# EAGLE board Jubeat Controller (EAGLE 6.2)
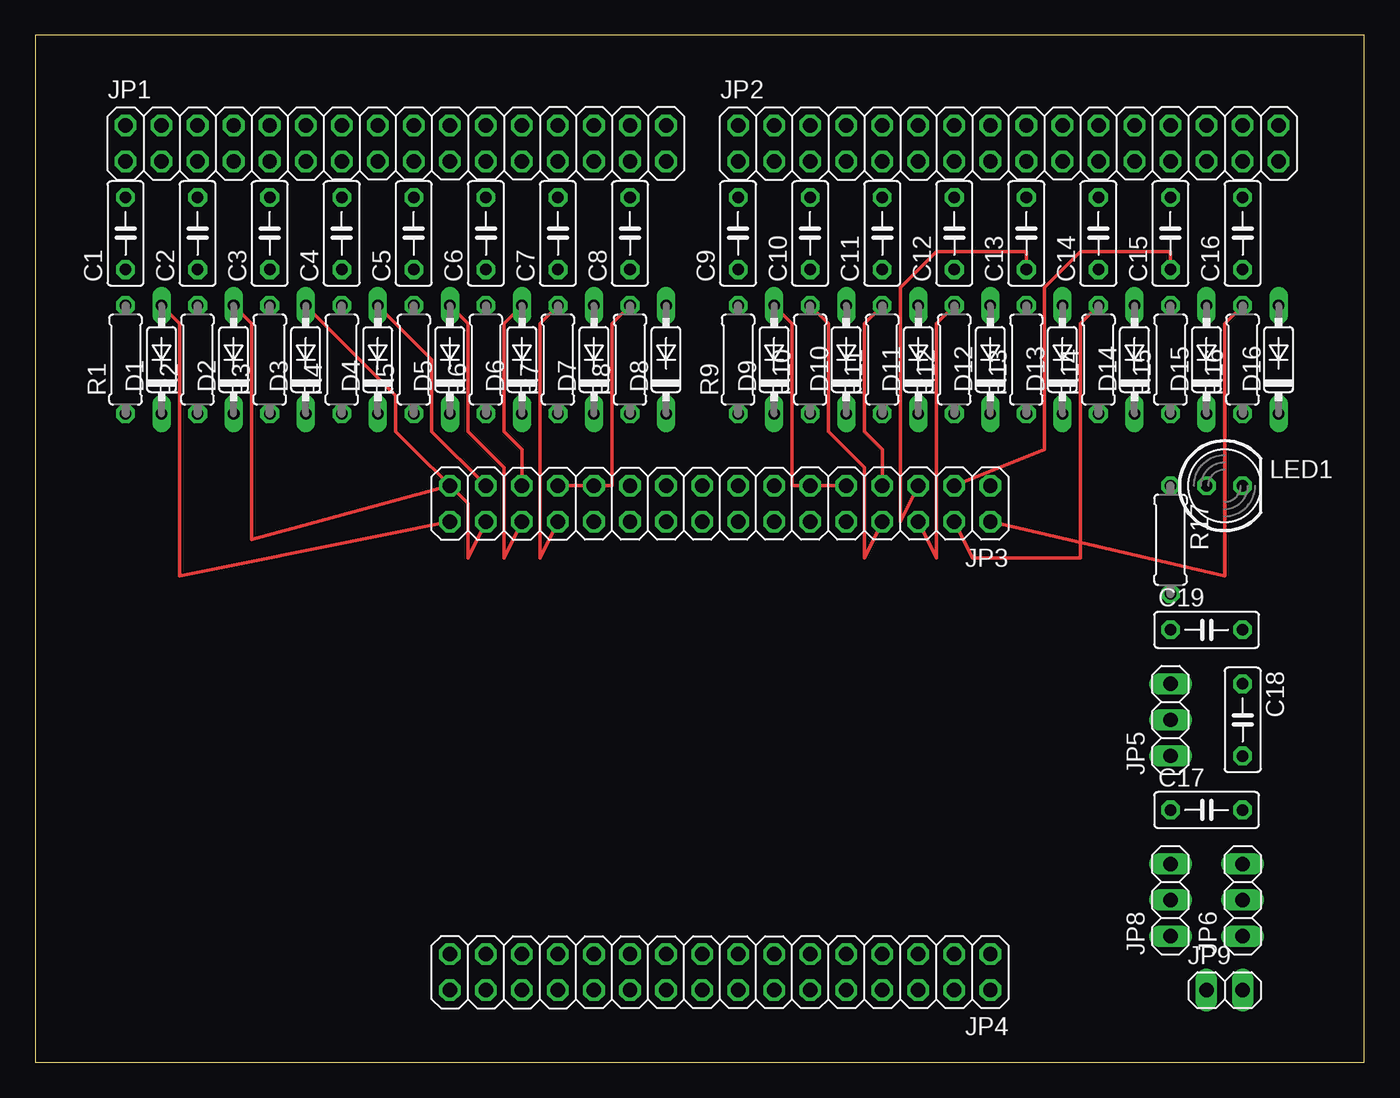
[diagram p0: board, top side]
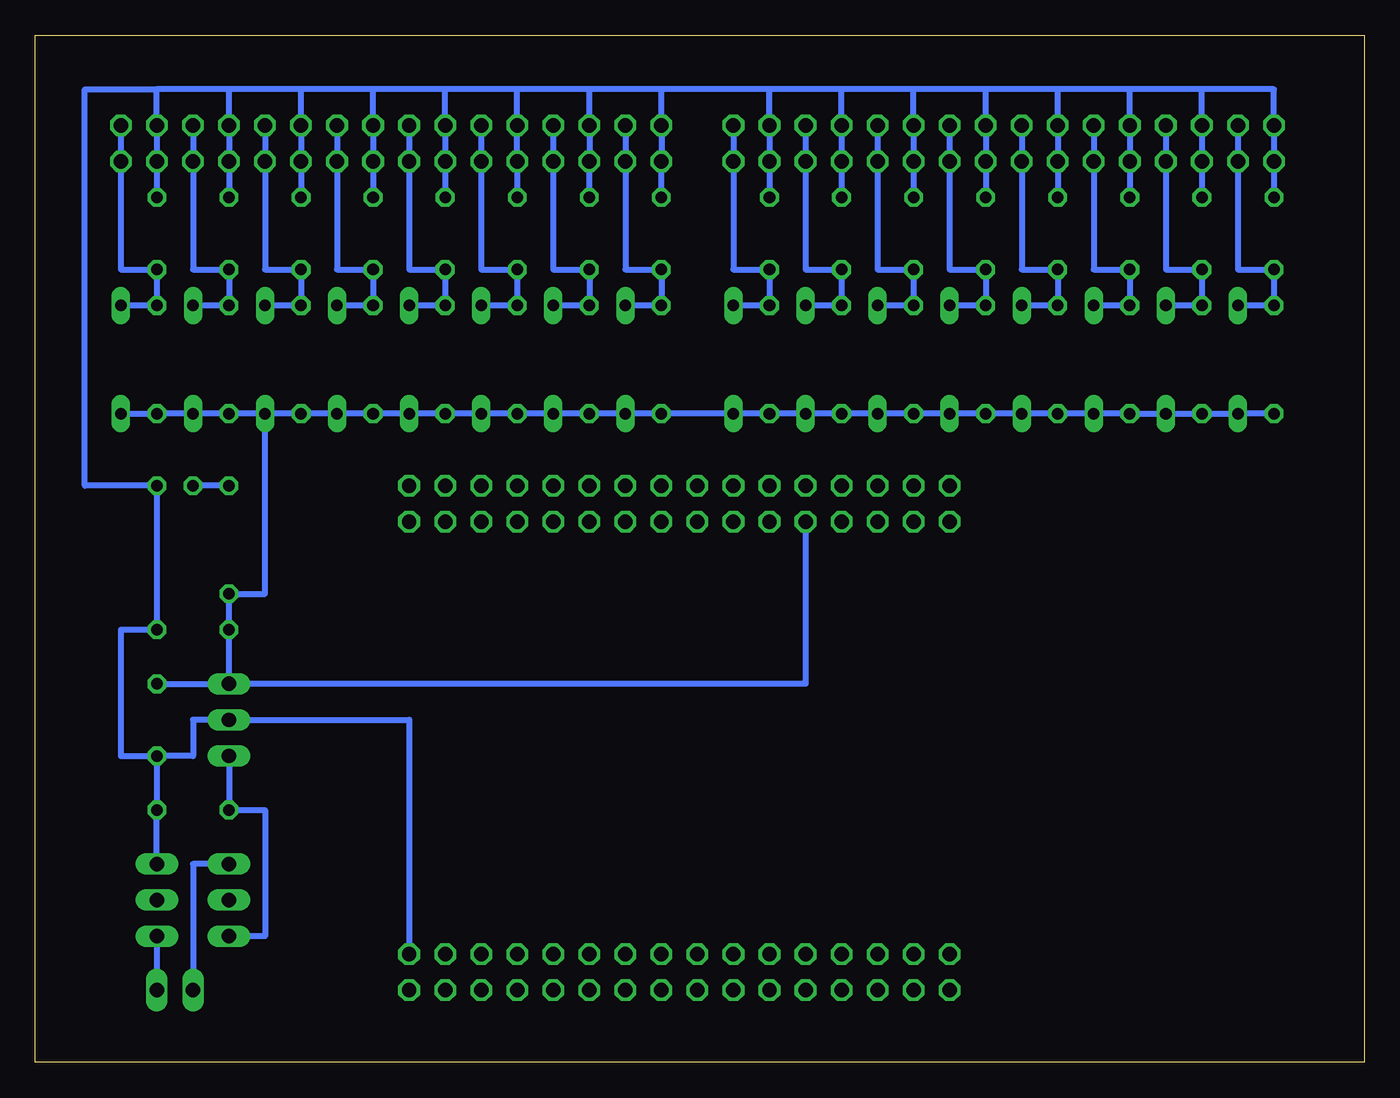
[diagram p1: board, bottom side, seen from below]

Size 93.65 x 72.38 mm. Coordinates in mm from the lower left corner, seen from the top.
Outline: 0,0 93.65,0 93.65,72.38 0,72.38 0,0
Copper layers (1*16): Top 0.035mm / dielectric 1.5mm / Bottom 0.035mm
Design rules: minimum track width 10mil, minimum drill 24mil, track to track 8mil, track to pad 8mil, pad to pad 8mil, via to via 8mil, smd to smd 8mil, copper to edge 40mil, drill to drill 8mil, minimum pad ring 10mil, minimum via ring 8mil, stop-mask expansion 4mil, vias tented up to drill 0mil, thermal gap 10mil

## Footprints (pad centres in the part's own frame; a part is rotated, then mirrored left to right if it is on the bottom)
C050-025X075 = drill 0.813 octagon: 1 -2.54,0; 2 2.54,0
DO35-7 = drill 0.813 long: A 3.81,0; C -3.81,0
2X16 = drill 1.016 octagon: 1 -19.05,-1.27; 2 -19.05,1.27; 3 -16.51,-1.27; 4 -16.51,1.27; 5 -13.97,-1.27; 6 -13.97,1.27; 7 -11.43,-1.27; 8 -11.43,1.27; 9 -8.89,-1.27; 10 -8.89,1.27; 11 -6.35,-1.27; 12 -6.35,1.27; 13 -3.81,-1.27; 14 -3.81,1.27; 15 -1.27,-1.27; 16 -1.27,1.27; 17 1.27,-1.27; 18 1.27,1.27; 19 3.81,-1.27; 20 3.81,1.27; 21 6.35,-1.27; 22 6.35,1.27; 23 8.89,-1.27; 24 8.89,1.27; 25 11.43,-1.27; 26 11.43,1.27; 27 13.97,-1.27; 28 13.97,1.27; 29 16.51,-1.27; 30 16.51,1.27; 31 19.05,-1.27; 32 19.05,1.27
1X03 = drill 1.016 long: 1 -2.54,0; 2 0,0; 3 2.54,0
1X02 = drill 1.016 long: 1 -1.27,0; 2 1.27,0
LED5MM = drill 0.813 octagon: A -1.27,0; K 1.27,0
0207/7 = drill 0.813 octagon: 1 -3.81,0; 2 3.81,0

## Placement (x,y rotation side)
C1  [C050-025X075]  6.35,58.42 90 top
C2  [C050-025X075]  11.43,58.42 90 top
C3  [C050-025X075]  16.51,58.42 90 top
C4  [C050-025X075]  21.59,58.42 90 top
C5  [C050-025X075]  26.67,58.42 90 top
C6  [C050-025X075]  31.75,58.42 90 top
C7  [C050-025X075]  36.83,58.42 90 top
C8  [C050-025X075]  41.91,58.42 90 top
C9  [C050-025X075]  49.53,58.42 90 top
C10  [C050-025X075]  54.61,58.42 90 top
C11  [C050-025X075]  59.69,58.42 90 top
C12  [C050-025X075]  64.77,58.42 90 top
C13  [C050-025X075]  69.85,58.42 90 top
C14  [C050-025X075]  74.93,58.42 90 top
C15  [C050-025X075]  80.01,58.42 90 top
C16  [C050-025X075]  85.09,58.42 90 top
C17  [C050-025X075]  82.55,17.78 0 top
C18  [C050-025X075]  85.09,24.13 270 top
C19  [C050-025X075]  82.55,30.48 0 top
D1  1N4148DO35-7  [DO35-7]  8.89,49.53 90 top
D2  1N4148DO35-7  [DO35-7]  13.97,49.53 90 top
D3  1N4148DO35-7  [DO35-7]  19.05,49.53 90 top
D4  1N4148DO35-7  [DO35-7]  24.13,49.53 90 top
D5  1N4148DO35-7  [DO35-7]  29.21,49.53 90 top
D6  1N4148DO35-7  [DO35-7]  34.29,49.53 90 top
D7  1N4148DO35-7  [DO35-7]  39.37,49.53 90 top
D8  1N4148DO35-7  [DO35-7]  44.45,49.53 90 top
D9  1N4148DO35-7  [DO35-7]  52.07,49.53 90 top
D10  1N4148DO35-7  [DO35-7]  57.15,49.53 90 top
D11  1N4148DO35-7  [DO35-7]  62.23,49.53 90 top
D12  1N4148DO35-7  [DO35-7]  67.31,49.53 90 top
D13  1N4148DO35-7  [DO35-7]  72.39,49.53 90 top
D14  1N4148DO35-7  [DO35-7]  77.47,49.53 90 top
D15  1N4148DO35-7  [DO35-7]  82.55,49.53 90 top
D16  1N4148DO35-7  [DO35-7]  87.63,49.53 90 top
JP1  [2X16]  25.4,64.77 0 top
JP2  [2X16]  68.58,64.77 0 top
JP3  LEFT  [2X16]  48.26,39.37 180 top
JP4  RIGHT  [2X16]  48.26,6.35 180 top
JP5  [1X03]  80.01,24.13 90 top
JP6  [1X03]  85.09,11.43 90 top
JP8  [1X03]  80.01,11.43 90 top
JP9  [1X02]  83.82,5.08 0 top
LED1  [LED5MM]  83.82,40.64 0 top
R1  [0207/7]  6.35,49.53 90 top
R2  [0207/7]  11.43,49.53 90 top
R3  [0207/7]  16.51,49.53 90 top
R4  [0207/7]  21.59,49.53 90 top
R5  [0207/7]  26.67,49.53 90 top
R6  [0207/7]  31.75,49.53 90 top
R7  [0207/7]  36.83,49.53 90 top
R8  [0207/7]  41.91,49.53 90 top
R9  [0207/7]  49.53,49.53 90 top
R10  [0207/7]  54.61,49.53 90 top
R11  [0207/7]  59.69,49.53 90 top
R12  [0207/7]  64.77,49.53 90 top
R13  [0207/7]  69.85,49.53 90 top
R14  [0207/7]  74.93,49.53 90 top
R15  [0207/7]  80.01,49.53 90 top
R16  [0207/7]  85.09,49.53 90 top
R17  [0207/7]  80.01,36.83 270 top

## Library data of the parts
C1-C16 R1-R16 = resistor
C17-C19 R17 = rcl
D1-D16 = diode
JP1-JP6 JP8 JP9 = pinhead
LED1 = led

## Nets
GND: C1.2 C2.2 C3.2 C4.2 C5.2 C6.2 C7.2 C8.2 C9.2 C10.2 C11.2 C12.2 C13.2 C14.2 C15.2 C16.2 C17.2 C18.2 C19.2 JP1.1 JP1.2 JP1.5 JP1.6 JP1.9 JP1.10 JP1.13 JP1.14 JP1.17 JP1.18 JP1.21 JP1.22 JP1.25 JP1.26 JP1.29 JP1.30 JP2.1 JP2.2 JP2.5 JP2.6 JP2.9 JP2.10 JP2.13 JP2.14 JP2.17 JP2.18 JP2.21 JP2.22 JP2.25 JP2.26 JP2.29 JP2.30 JP4.1 JP5.2 JP6.3 LED1.K
N$1: C17.1 JP5.1 JP8.1
N$2: C2.1 D2.A JP1.7 JP1.8 JP3.31 R2.2
N$5: JP6.1 JP9.2
N$6: C6.1 D6.A JP1.23 JP1.24 JP3.27 R6.2
N$7: LED1.A R17.1
N$8: C8.1 D8.A JP1.31 JP1.32 JP3.25 R8.2
N$9: C9.1 D9.A JP2.3 JP2.4 JP3.9 R9.2
N$10: C10.1 D10.A JP2.7 JP2.8 JP3.8 R10.2
N$11: C11.1 D11.A JP2.11 JP2.12 JP3.7 R11.2
N$12: C12.1 D12.A JP2.15 JP2.16 JP3.6 R12.2
N$13: C13.1 D13.A JP2.19 JP2.20 JP3.5 R13.2
N$14: C14.1 D14.A JP2.23 JP2.24 JP3.4 R14.2
N$15: C15.1 D15.A JP2.27 JP2.28 JP3.3 R15.2
N$16: C16.1 D16.A JP2.31 JP2.32 JP3.2 R16.2
N$18: C7.1 D7.A JP1.27 JP1.28 JP3.26 R7.2
N$19: JP8.3 JP9.1
N$21: C5.1 D5.A JP1.19 JP1.20 JP3.28 R5.2
N$23: C3.1 D3.A JP1.11 JP1.12 JP3.30 R3.2
N$24: C1.1 D1.A JP1.3 JP1.4 JP3.32 R1.2
N$26: C4.1 D4.A JP1.15 JP1.16 JP3.29 R4.2
VCC: C18.1 C19.1 D1.C D2.C D3.C D4.C D5.C D6.C D7.C D8.C D9.C D10.C D11.C D12.C D13.C D14.C D15.C D16.C JP3.24 JP5.3 R1.1 R2.1 R3.1 R4.1 R5.1 R6.1 R7.1 R8.1 R9.1 R10.1 R11.1 R12.1 R13.1 R14.1 R15.1 R16.1 R17.2

## Tracks (layer width: path | path; a pad name or v marks a point on that pad's centre or on a via)
GND
  Bottom 0.406: JP6.3 C17.2 C18.2 | JP4.1 67.31,24.13 JP5.2 82.55,24.13 82.55,21.59 C18.2 | C18.2 87.63,21.59 87.63,30.48 C19.2 LED1.K 90.17,40.64 90.17,68.58 85.09,68.58 | C9.2 JP2.1 JP2.2 49.53,68.58 | C10.2 JP2.5 JP2.6 54.61,68.58 | C11.2 JP2.9 JP2.10 59.69,68.58 | C1.2 JP1.1 JP1.2 6.35,68.58 11.43,68.58 | C2.2 JP1.5 JP1.6 11.43,68.58 | C3.2 JP1.9 JP1.10 16.51,68.58 | C4.2 JP1.13 JP1.14 21.59,68.58 | C5.2 JP1.17 JP1.18 26.67,68.58 | C6.2 JP1.21 JP1.22 31.75,68.58 | C7.2 JP1.25 JP1.26 36.83,68.58 | C8.2 JP1.29 JP1.30 41.91,68.58 | C12.2 JP2.13 JP2.14 64.77,68.58 | C13.2 JP2.17 JP2.18 69.85,68.58 | C14.2 JP2.21 JP2.22 74.93,68.58 | C15.2 JP2.25 JP2.26 80.01,68.58 | C16.2 JP2.29 JP2.30 85.09,68.58 | 11.43,68.58 16.51,68.58 | 16.51,68.58 21.59,68.58 | 21.59,68.58 26.67,68.58 | 26.67,68.58 31.75,68.58 | 31.75,68.58 36.83,68.58 | 36.83,68.58 41.91,68.58 | 41.91,68.58 49.53,68.58 | 49.53,68.58 54.61,68.58 | 54.61,68.58 59.69,68.58 | 59.69,68.58 64.77,68.58 | 64.77,68.58 69.85,68.58 | 69.85,68.58 74.93,68.58 | 74.93,68.58 80.01,68.58 | 80.01,68.58 85.09,68.58
N$1
  Bottom 0.406: JP5.1 C17.1 77.47,17.78 77.47,8.89 JP8.1
N$2
  Top 0.254: JP3.31 15.24,36.83 15.24,52.07 D2.A
  Bottom 0.406: JP1.8 JP1.7 13.97,55.88 C2.1 R2.2 D2.A
N$5
  Bottom 0.406: JP6.1 JP9.2
N$6
  Top 0.254: JP3.27 34.29,43.18 33.02,44.45 33.02,52.07 D6.A
  Bottom 0.406: JP1.24 JP1.23 34.29,55.88 C6.1 R6.2 D6.A
N$7
  Bottom 0.406: R17.1 LED1.A
N$8
  Top 0.254: JP3.25 40.64,40.64 40.64,52.07 R8.2
  Bottom 0.406: JP1.32 JP1.31 44.45,55.88 C8.1 R8.2 D8.A
N$9
  Top 0.254: JP3.9 53.34,40.64 53.34,52.07 D9.A
  Bottom 0.406: JP2.4 JP2.3 52.07,55.88 C9.1 R9.2 D9.A
N$10
  Top 0.254: JP3.8 58.42,35.56 58.42,41.91 55.88,44.45 55.88,52.07 R10.2
  Bottom 0.406: JP2.8 JP2.7 57.15,55.88 C10.1 R10.2 D10.A
N$11
  Top 0.254: JP3.7 59.69,43.18 58.42,44.45 58.42,52.07 R11.2
  Bottom 0.406: JP2.12 JP2.11 62.23,55.88 C11.1 R11.2 D11.A
N$12
  Top 0.254: JP3.6 63.5,35.56 63.5,52.07 R12.2
  Bottom 0.406: JP2.16 JP2.15 67.31,55.88 C12.1 R12.2 D12.A
N$13
  Top 0.254: JP3.5 60.96,38.1 60.96,54.61 63.5,57.15 69.85,57.15 C13.1
  Bottom 0.406: JP2.20 JP2.19 72.39,55.88 C13.1 R13.2 D13.A
N$14
  Top 0.254: JP3.4 66.04,35.56 73.66,35.56 73.66,52.07 R14.2
  Bottom 0.406: JP2.24 JP2.23 77.47,55.88 C14.1 R14.2 D14.A
N$15
  Top 0.254: JP3.3 71.12,43.18 71.12,54.61 73.66,57.15 80.01,57.15 C15.1
  Bottom 0.406: JP2.28 JP2.27 82.55,55.88 C15.1 R15.2 D15.A
N$16
  Top 0.254: JP3.2 83.82,34.29 83.82,52.07 R16.2
  Bottom 0.406: JP2.32 JP2.31 87.63,55.88 C16.1 R16.2 D16.A
N$18
  Top 0.254: JP3.26 35.56,35.56 35.56,52.07 R7.2
  Bottom 0.406: JP1.28 JP1.27 39.37,55.88 C7.1 R7.2 D7.A
N$19
  Bottom 0.406: JP8.3 82.55,13.97 JP9.1
N$21
  Top 0.254: JP3.28 33.02,35.56 33.02,41.91 30.48,44.45 30.48,52.07 D5.A
  Bottom 0.406: JP1.20 JP1.19 29.21,55.88 C5.1 R5.2 D5.A
N$23
  Top 0.254: JP3.30 30.48,35.56 30.48,39.37 25.4,44.45 25.4,46.99 D3.A
  Bottom 0.406: JP1.12 JP1.11 19.05,55.88 C3.1 R3.2 D3.A
N$24
  Top 0.254: JP3.32 10.16,34.29 10.16,52.07 D1.A
  Bottom 0.406: JP1.4 JP1.3 8.89,55.88 C1.1 R1.2 D1.A
N$26
  Top 0.254: JP3.29 27.94,44.45 27.94,49.53 D4.A
  Bottom 0.406: JP1.16 JP1.15 24.13,55.88 C4.1 R4.2 D4.A
VCC
  Bottom 0.406: C18.1 JP5.3 | JP5.3 C19.1 R17.2 77.47,33.02 D14.C | D16.C R16.1 D15.C R15.1 D14.C | D14.C R14.1 D13.C R13.1 D12.C R12.1 D11.C R11.1 D10.C R10.1 D9.C R9.1 D8.C R8.1 D7.C R7.1 D6.C R6.1 D5.C R5.1 D4.C R4.1 D3.C R3.1 D2.C R2.1 D1.C R1.1 | JP3.24 39.37,26.67 JP5.3